# Altium PCB High-voltage.PcbDoc (part 2 of 2)
Units mil, origin at the board's own origin, x right, y up, seen from the top; angles counter-clockwise.
Board outline 11023.62 x 6692.91 mil, 2 copper layers (Top Layer, Bottom Layer); 241 components, 97 nets, 501 pads, 433 vias.
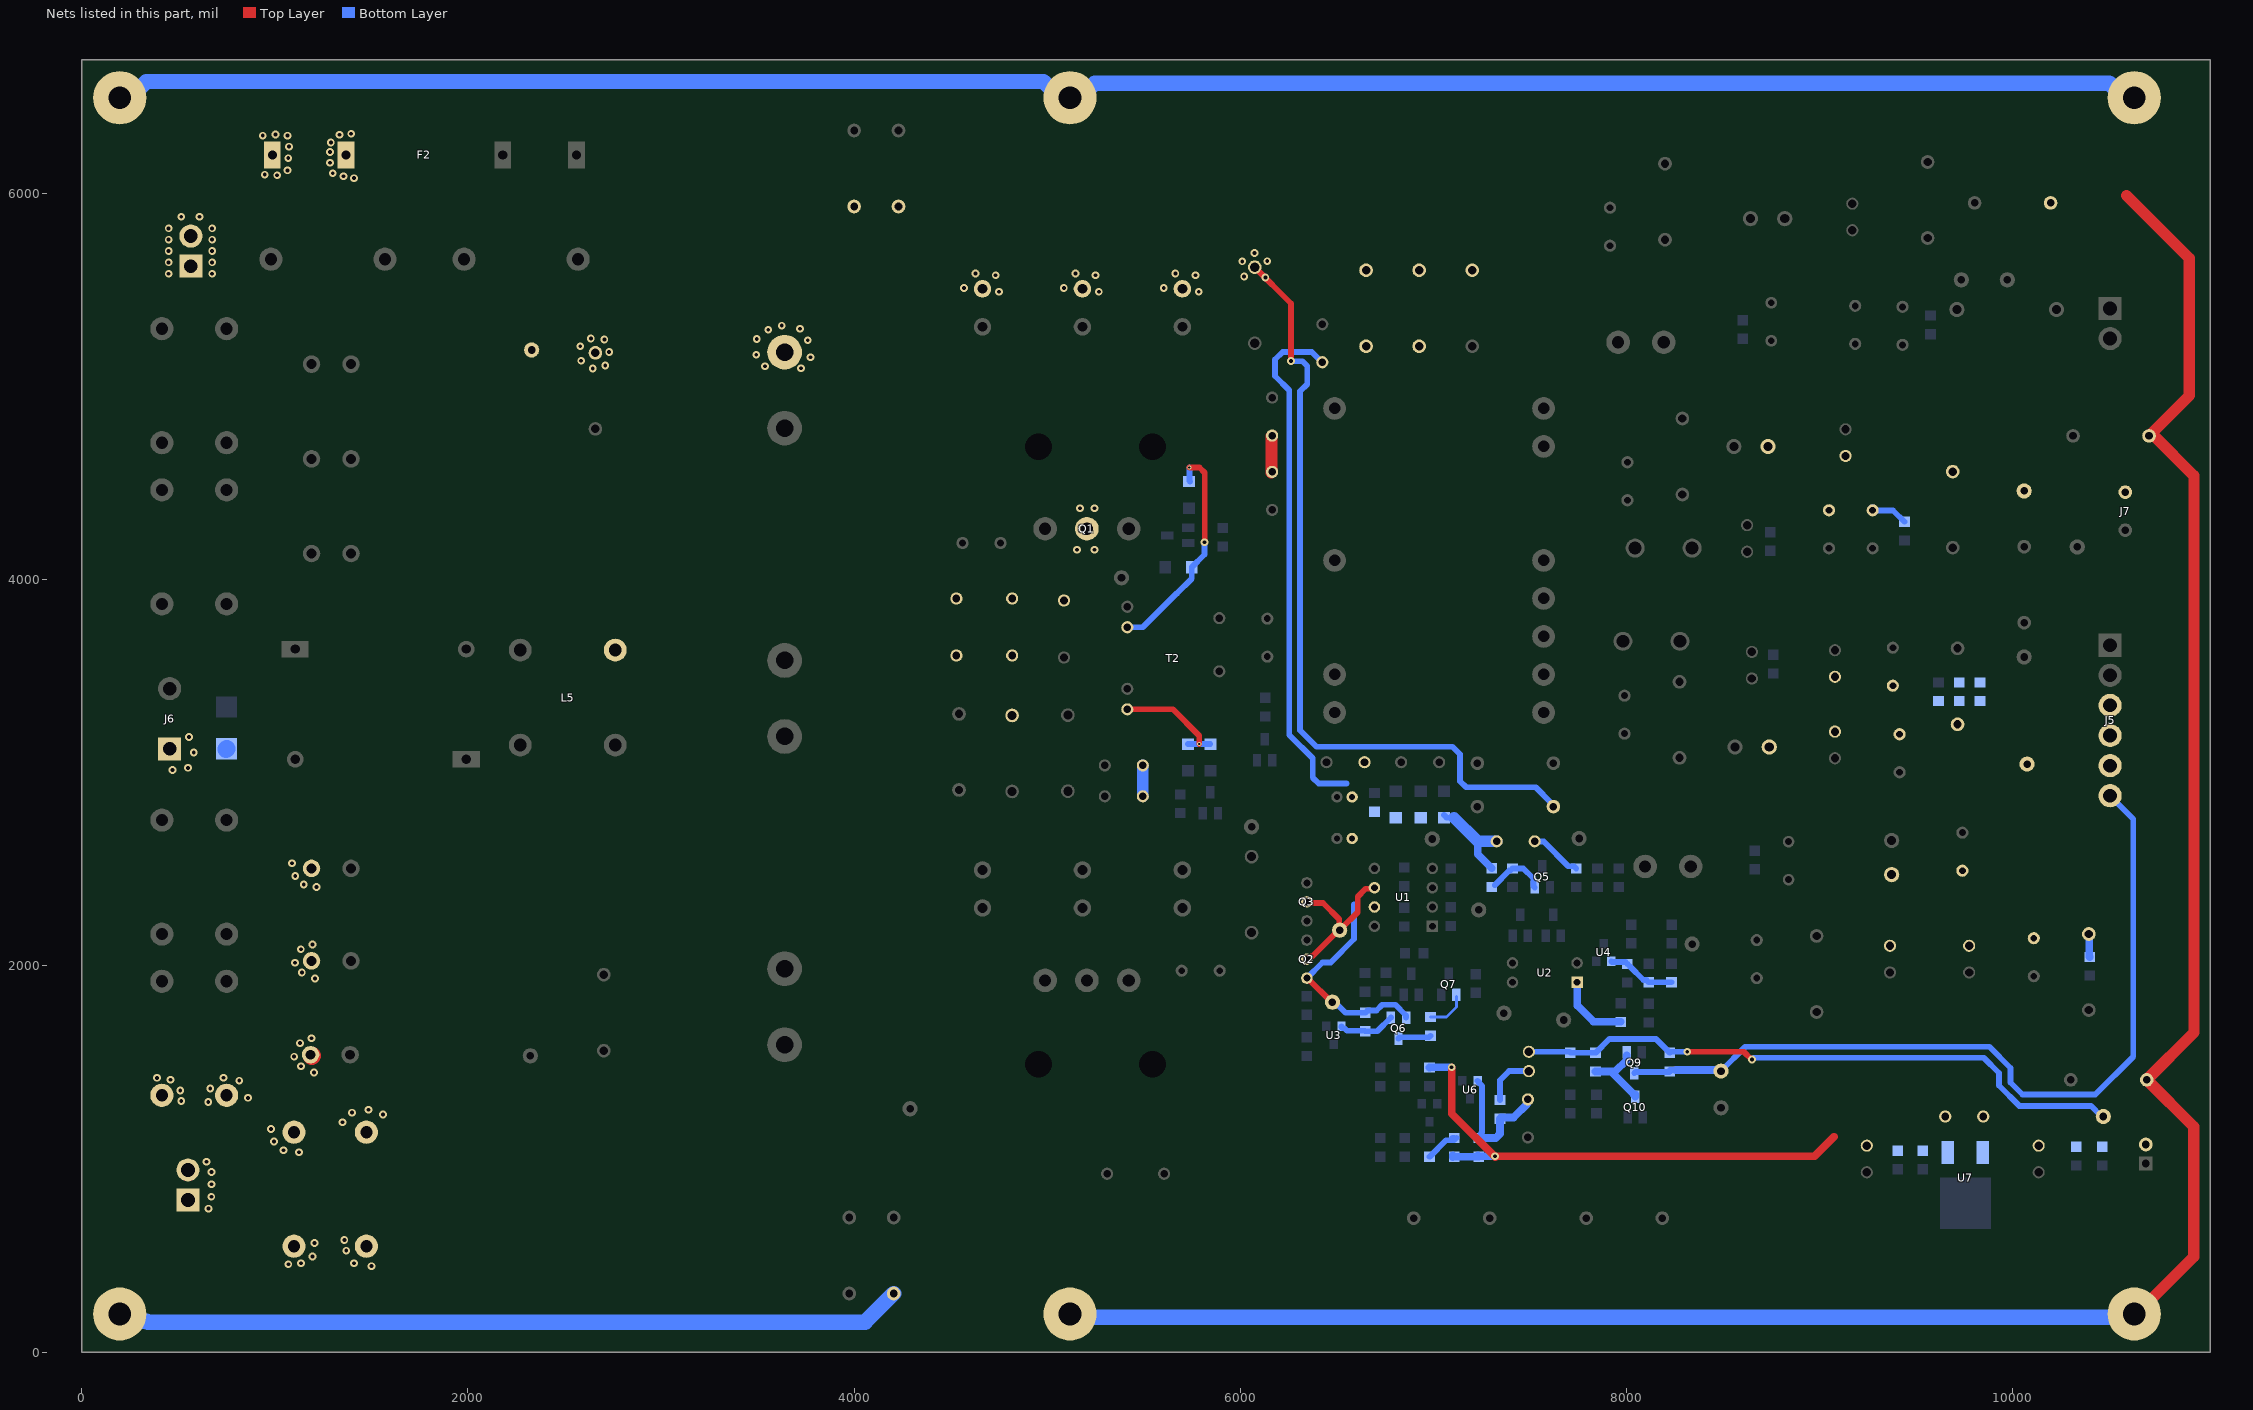
[diagram p2: the nets of this part, all layers, seen from the top]

## Via types
v1: diameter 40, hole 20, Top Layer to Bottom Layer, tented both sides, 426 vias
v2: diameter 40, hole 20, Top Layer to Bottom Layer, 3 vias
v3: diameter 22, hole 12, Top Layer to Bottom Layer, 2 vias
v4: diameter 22, hole 12, Top Layer to Bottom Layer, tented both sides, 1 vias
v5: diameter 40, hole 22, Top Layer to Bottom Layer, 1 vias

## Nets (pads, with @x,y where several pads share a name; then routed paths per layer and width w, separated by ;. In a path a pad name is that pad's centre, name@x,y a point inside that pad or via, vN(x,y) a via of type N, cw(c..) or ccw(c..) an arc to the next point about the centre after c; other vN are vias at no path point) (continued)
NetD25_1: D25.1 D26.1 D28.1 SR10.1 SR11.1 SR12.1 | length 17.4
  Top Layer w90: D26.1@415,1329.72 D26.1@419.72,1325 ; D25.1@750,1329.72 D25.1@754.72,1325 ; SR10.1@1190.28,1532.47 SR10.1@1193.15,1535.34
  other v1: 1350,1190 1560,1230 1400,1240 1485,1255 655,1295 515,1300 860.72,1316.66 510,1355 665,1365 815.34,1405.55 460,1410 390,1420 733.62,1421 1203.2,1448.26 1135,1480 1100,1530 1130,1600 1190,1625 1207.92,1934.53 1139.72,1966.27 1104.72,2016.27 1134.72,2086.27 1194.72,2111.27 1216.12,2408.28 1149.94,2421.97 1105.82,2465.33 1089.09,2531.51
NetD27_1: D27.1 D28.2 | length 11.7
  Top Layer w90: D28.2@1474.06,548.1 1483.1,548.1 D28.2@1485,550
  other v1: 1500,445 1070,455 1135,460 1410,460 1195,495 1370,525 1205,565 1360,580
NetD27_2: D27.2 J3.1 J3.2 | length 18.6
  Top Layer w90: J3.2@550,930 J3.2@555,935 ; D27.2@1099.06,1138.65 1108.65,1138.65 D27.2@1110,1140
  other v1: 656.43,742.53 671.03,804.3 671.94,869.03 671.59,932.88 646.32,985.67 1125,1035 1045,1045 995,1090 980,1155
NetF2_1: F2.1 F2.2 J1.1 J1.2
  other v1: 450,5585 675,5585 450,5643.75 675,5643.75 450,5702.5 675,5702.5 450,5761.25 675,5761.25 450,5820 675,5820 515,5880 610,5880 1410,6080 1355,6090 1011.77,6094.89 947.51,6098.12 1300,6105 1065.52,6120.35 1285,6160 1069.56,6183.39 1285,6215 1073.2,6243.21 1290,6265 937,6300.19 1065,6300 1003.69,6305.45 1335,6305 1395,6310
NetF3_1: F3.1 J6.1 | length 4
  Bottom Layer w90: F3.1@747.19,3121.29 F3.1@750,3124.09
  other v1: 470,3015 550.13,3025.8 580.1,3105.52 555.52,3185.25
NetJ5_6: J5.6 Q9.3 R38.2 TP17.1 | length 4271
  Bottom Layer w30: Q9.3@8040.84,1444.84 8046.58,1450.57 8222.03,1450.57 R38.2@8225,1453.54 ; R38.2@8225,1460.63 8255,1460.63 ; TP17.1@8490,1455 8615.71,1580.71 9879.87,1580.71 9989.87,1470.71 9989.87,1395.43 10051.65,1333.66 10428.66,1333.66 10625,1530 10625,2761.38 J5.6@10505,2881.38
  Bottom Layer w40: 8255,1460.63 8470,1460.63 8475.63,1455 TP17.1@8490,1455
NetLED1_1: LED1.1 R46.1 | length 276.3
  Bottom Layer w30: R46.1@7345,1305 7345,1407.43 7392.57,1455 7485,1455 LED1.1@7495,1465
NetQ2_2: Q2.2 Q3.2 TP7.1 U1.6 | length 812.7
  Top Layer w30: Q2.2@6345,2035 6353.12,2035 6368.12,2050 6373.89,2050 6508.89,2185 TP7.1@6515,2185 ; Q3.2@6345,2331.58 6350.74,2325.84 6428.51,2325.84 6512.51,2241.83 6512.51,2187.49 TP7.1@6515,2185 ; U1.6@6695,2405 6689.26,2399.26 6649.26,2399.26 6608.15,2358.15 6608.15,2278.15 6524.33,2194.33 TP7.1@6515,2185
NetQ5_2: Q5.2 R27.1 R33.1 | length 307.3
  Bottom Layer w30: R27.1@7317.79,2417.79 7393.43,2493.43 7398.43,2493.43 R33.1@7410,2505 7465.85,2505 7518.72,2452.13 7518.72,2413.19 Q5.2@7525.37,2406.54
NetQ6_1: Q6.1 R32.2 U3.2 | length 296.4
  Bottom Layer w30: U3.2@6524.37,1686.26 6524.37,1683.31 6531.02,1676.65 6540.38,1676.65 6553.32,1663.71 6644.89,1663.71 R32.2@6647.35,1661.26 ; R32.2@6648.33,1661.26 6648.52,1661.45 6709.59,1661.45 Q6.1@6780.33,1732.19
NetQ6_3: Q6.3 R37.1 | length 171.4
  Bottom Layer w30: Q6.3@6819.7,1623.92 6825.78,1630 6976.46,1630 R37.1@6985,1638.54
NetQ7_1: Q7.1 R37.2 | length 210.9
  Bottom Layer w15: R37.2@6985,1735 7067.89,1735 7119.37,1786.48 Q7.1@7119.37,1841.73
NetQ9_1: Q9.1 Q10.3 R39.2 | length 395.8
  Bottom Layer w40: R39.2@7840,1453.54 7919.25,1453.54 ; Q9.1@8001.52,1535.58 8001.47,1535.54 8001.47,1512.28 7942.74,1453.54 7919.25,1453.54 ; Q10.3@8045.63,1323.27 8045.63,1334.09 8043.98,1335.75 8037.05,1335.75 7919.25,1453.54
NetR1_2: R1.2 R2.2
NetR2_1: R2.1 R3.1
NetR5_1: R5.1 R7.1 T2.6 | length 1178.4
  Top Layer w30: v3(5736.6,4581.01) 5788.99,4581.01 5816.01,4553.99 5816.01,4195.43 v2(5815.03,4194.46)
  Bottom Layer w30: T2.6@5415,3753.9 5495,3753.9 5670.48,3929.38 5672.6,3929.38 5748.9,4005.67 R5.1@5748.9,4065 5815.03,4131.14 v2(5815.03,4194.46) ; v3(5736.6,4581.01) 5736.6,4512.3 R7.1@5740,4508.9
NetR13_1: R13.1 R16.1 T2.10 | length 587.5
  Top Layer w30: T2.10@5415,3328.7 5651.3,3328.7 5787.5,3192.5 v4(5787.5,3148.9)
  Bottom Layer w30: R16.1@5730,3148.9 v4(5787.5,3148.9) R13.1@5845,3148.9
NetR26_2: R26.2 U2.1 | length 380.4
  Bottom Layer w40: U2.1@7744.65,1915 7744.65,1795.35 7830,1710 R26.2@7970,1710
NetR28_2: R28.2 R30.2
NetR30_1: R30.1 R34.1
NetR31_2: R31.2 R36.1 R41.1 U4.1 | length 339.1
  Bottom Layer w30: U4.1@7921.61,2023.33 7925.55,2019.39 7995.61,2019.39 R41.1@8005,2010 ; R41.1@8017.56,1998.15 8089.13,1926.57 8103.43,1926.57 R36.1@8115,1915 R31.2@8233.33,1915
NetR35_1: R35.1 VD6.2 | length 273
  Bottom Layer w30: VD6.2@7525,2645 7526.36,2643.64 7571.82,2643.64 7698.88,2516.57 7728.43,2516.57 R35.1@7740,2505
NetR40_2: R40.2 R47.1 | length 187.3
  Bottom Layer w30: R47.1@6980,1011.77 6980.98,1011.77 7065.87,1096.65 7106.65,1096.65 R40.2@7120,1110 ; R40.2@7105,1110 7106.77,1108.23 R40.2@7107.5,1108.23
  Bottom Layer w40: R40.2@7099.94,1101.65 7100,1101.71 R40.2@7100,1105
NetR45_2: R45.2 R46.2 U6.2 VD7.1 | length 701.8
  Bottom Layer w30: U6.2@7229.37,1404.7 7236.02,1398.05 7236.02,1395.1 7252.72,1378.41 7252.72,1137.38 7247.56,1132.22 7247.56,1119.8 7235.98,1108.23 R45.2@7235,1108.23
  Bottom Layer w40: R45.2@7235,1108.23 7323.23,1108.23 7345,1130 R46.2@7345,1208.54 ; R46.2@7350.12,1215.12 7416.29,1215.12 7485.6,1284.43 7485.6,1304.18 VD7.1@7490,1308.58
NetVD2_1: VD2.1 VD3.1 | length 197.6
  Top Layer w60: VD2.1@6160,4555 VD2.1@6165,4560 ; VD2.1@6165,4558.58 6165,4559.39 6161.72,4562.67 6161.72,4742.33 6165,4745.61 VD3.1@6165,4746.42
NetVD4_1: VD4.1 VD5.1 | length 160
  Bottom Layer w60: VD4.1@5495.57,2878.35 VD5.1@5495.57,3038.35
PE: C5.2 C14.2 C43.1 C61.2 C65.1 SC1.1 SC2.1 SC3.1 SC4.1 SC5.1 SC6.1 | length 26516.8
  Top Layer w59.06: 10590,5990 10916.01,5663.99 10916.01,4954.16 C14.2@10706.85,4745 10709.11,4742.74 10734.71,4742.74 10939.84,4537.62 10939.84,1654.84 C43.1@10695,1410 10938.96,1166.04 10938.96,494.12 SC5.1@10625.92,181.08
  Bottom Layer w80: SC2.1@196.85,196.85 234.28,159.43 337.08,159.43 341.51,155 618.31,155 4056.85,155 C65.1@4205,303.15 ; SC3.1@196.85,6496.06 249.78,6496.06 334.16,6580.44 4980.8,6580.44 5065.18,6496.06 5171.04,6496.06 5247.16,6572.19 10500.87,6572.19 10576.99,6496.06 SC1.1@10629.92,6496.06 ; SC4.1@5171.56,181.06 SC5.1@10561.21,181.06
VCC+5V: C52.1 C66.1 C67.2 D22.2 J2.2 LED1.2 R38.1 R39.1 R53.1 TP21.1 U7.3 | length 3224.1
  Top Layer w30: v1(8315,1555) 8607.29,1555 8647.29,1515 v1(8650,1515)
  Bottom Layer w30: LED1.2@7495,1555 7705,1555 C52.1@7710,1550 7710.17,1550.17 7839.83,1550.17 R39.1@7840,1550 7840.98,1550 7913,1622.02 8152,1622.02 8224.02,1550 R38.1@8225,1550 8230,1555 v1(8315,1555) ; v1(8650,1515) 8652.71,1515 8662.18,1524.48 9851.34,1524.48 9930,1445.82 9930,1380 10035,1275 10405.68,1275 10460.68,1220 TP21.1@10470,1220
VCC+12V: C16.2 C17.1 C19.1 C20.1 J7.3 L2.2 R12.2 TP5.1 | length 189.4
  Bottom Layer w30: C17.1@9275.86,4359.07 9380.93,4359.07 C16.2@9440,4300
  Bottom Layer w60: C17.1@9275.29,4359.65 C17.1@9275.86,4359.07
VCC+15V: C36.1 C37.1 C39.1 C40.1 C41.1 C45.2 C46.2 C68.1 C70.2 D22.1 J5.4 J5.5 L4.2 R24.1 R40.1 R43.1 R45.1 R54.1 TP15.1 U7.1 | length 2824.8
  Top Layer w40: v1(7095,1475) 7095,1235 v1@7320,1010 ; v1(7319.74,1014.38) 8974.38,1014.38 9075,1115
  Bottom Layer w40: R43.1@6980,1473.23 6981.77,1475 v1@7090,1475 ; R40.1@7099.94,1019.85 7099.94,1018.35 7106.51,1011.77 R40.1@7107.5,1011.77 ; R40.1@7100,1010 7101.77,1011.77 R45.1@7235,1011.77 7237.84,1014.62 7319.51,1014.62 v1(7319.74,1014.38) ; R45.1@7231.65,1018.35 R45.1@7235,1015 ; R24.1@10395,2165 10397.5,2162.5 10397.5,2048.96 C39.1@10400,2046.46
VCC+18V: C2.1 C4.2 C44.1 D1.1 Q2.1 Q6.2 R18.1 R21.1 R23.1 R27.2 R32.1 TP1.1 U1.7 VD1.1 VD6.1 | length 4364.6
  Top Layer w30: Q2.1@6345,1936.58 6348.87,1936.58 6473.37,1812.08 TP1.1@6477.24,1812.08
  Bottom Layer w30: Q2.1@6345,1936.58 6426.31,2017.89 6468.24,2017.89 6589.65,2139.3 6589.65,2318.46 ; D1.1@6425,5126.42 6423.98,5126.42 6370.4,5180 6220,5180 6180,5140 6180,5055 6253.81,4981.19 6253.81,3196.43 6375,3075.24 6375,2975 6406,2944 6550,2944 ; TP1.1@6477.24,1812.08 6490.43,1812.08 6545.45,1757.05 6634.79,1757.05 6635.45,1757.71 R32.1@6647.35,1757.71 6658.92,1769.29 6706.05,1769.29 6735,1798.24 6803.85,1798.24 6859.07,1743.01 Q6.2@6859.07,1732.19 ; R23.1@7055,2782.2 7069.53,2767.68 7107.03,2767.68 ; R27.2@7302,2505.65 R27.2@7302.98,2505.65
  Bottom Layer w40: 7229.71,2645 7229.71,2577.94 R27.2@7302,2505.65
  Bottom Layer w60: 7107.03,2767.68 7229.71,2645 VD6.1@7328.15,2645
VCC-15V: C30.2 C32.2 C33.2 C34.1 C35.1 C36.2 C37.2 J5.3 L3.2 R19.2
VDC: C48.1 C58.1 C59.1 D3.1 D4.2 L5.3 Q1.2 R1.1 R28.1 R51.2 SR1.2 SR2.2 SR3.2 TP19.1 | length 4096.4
  Top Layer w30: D4.2@6075,5618.7 6262.96,5430.74 v1(6262.96,5133.22)
  Bottom Layer w30: v1(6262.96,5133.22) 6264.87,5131.31 6321.8,5131.31 6346.55,5106.55 6346.55,5012.52 6310,4975.96 6310,3220.16 6395.2,3134.96 7099.08,3134.96 7138.3,3095.74 7138.3,2956.7 7170,2925 7530,2925 C48.1@7610,2845
  other v1: 5155,4155 5245,4155 5170,4370 5245,4370 2646.46,5094.11 3725,5095 3538.35,5105.56 2711.46,5109.11 2586.46,5134.11 3774.66,5151.99 3492.91,5165.31 2731.46,5179.11 2581.46,5209.11 3760,5240 2706.46,5244.11 3495.43,5246.93 2636.46,5249.11 3555,5295 3720,5300 3625.25,5315.86 4750,5491.85 5267.5,5491.85 5785,5491.85 4568.95,5511.41 5086.45,5511.41 5603.95,5511.41 6130.1,5565.09 6020,5570 4732.95,5577.12 5250.45,5577.12 5767.95,5577.12 4628.95,5586.27 5146.45,5586.27 5663.95,5586.27 6010.16,5649.04 6140,5650 6074.13,5691.82
pads on no net: Designator11.1 Designator11.2 Designator12.1 Designator12.2 J6.2 J7.2

## Polygon pours and split planes (outlines as drawn)
NetC21_2 on Top Layer "NONET_L01_P-001" (hatched Horizontal grid 4 track 5, remove dead copper, pour order 198): 8090,3335 8115,3310 8115,3200 8180,3135 8320,3135 8345,3110 8345,3025 8315,2995 8120,2995 7885,3230 7885,3315 7905,3335
GND on Top Layer "NONET_L01_P-001" (hatched Horizontal grid 4 track 5, remove dead copper, pour order 197): 6515,3010 6535,2990 6700,2990 6715,2975 6715,2935 6705,2925 6550,2925 6510,2900
NetD13_2 on Top Layer "NONET_L01_P-001" (hatched Horizontal grid 4 track 5, remove dead copper, pour order 196): 6465,3575 6465,3570 6430,3535 6430,3485 6460,3455 6525,3455 6580,3400 6580,3155 6625,3110 6730,3110 6815,3025 6860,3025 6885,3050 6885,3110 6725,3255 6725,3375 6725,3495 6645,3575
GND on Top Layer "NONET_L01_P-001" (hatched Horizontal grid 4 track 5, remove dead copper, pour order 194): 6440,3375 6525,3375 6550,3350 6550,3250 6550,2575 6590,2535 6720,2535 6730,2525 6730,2480 6720,2470 6505,2470 6440,2535 6440,2890 6415,2915 6415,3350
NetC12_1 on Top Layer "NONET_L01_P-001" (hatched Horizontal grid 4 track 5, remove dead copper, pour order 193): 4807.65,4352 4800.65,4345 4735,4345 4715,4325 4715,4175 4740,4150 4835,4150 4945,4040 4981,4004 5174,4004 5230,4060 5230,4105 5215,4120 5080,4120 5043.68,4156.32 5043.68,4344 4886,4344 4885,4345
NetC12_1 on Top Layer "NONET_L01_P-001" (hatched Horizontal grid 4 track 5, remove dead copper, pour order 191): 5227.37,3937.63 5142.38,4022.63 5227.37,4107.63 5280,4055 5415,4055 5445,4025 5445,3845 5420,3820 5345,3820 5305,3780 5305,3445 5120,3260 5085,3260 5055,3290 5055,3340 5227.37,3512.37
no net on Top Layer "NONET_L01_P-001" (hatched Horizontal grid 4 track 5, remove dead copper, pour order 190): 4985,4245
NetC12_1 on Top Layer "NONET_L01_P-001" (hatched Horizontal grid 4 track 5, remove dead copper, pour order 189): 4805,4350 5170,4625 5170,4905 5280,5015 6315,5015 6375,4955 6525,4955 6560,4920 6560,4805 6545,4790 6345,4790 6270,4865 5395,4865 5340,4810 5340,4545 4982.5,4302.5 4970,4315
NetD3_2 on Top Layer "NONET_L01_P-001" (hatched Horizontal grid 4 track 5, remove dead copper, pour order 183): 5976.08,2920 5999.59,2992.5 6005,3325 6125,3445 6235,3555 6235,4075 6335,4175 6570,4175 6590,4155 6590,4035 6550,3995 6370,3995 6355,3980 6355,3480 6170,3295 6170,2971.43
no net on Top Layer "NONET_L01_P-001" (hatched Horizontal grid 4 track 5, remove dead copper, pour order 181): 6060,3170
NetD3_2 on Top Layer "NONET_L01_P-001" (hatched Horizontal grid 4 track 5, remove dead copper, pour order 180): 5909.5,2714.72 5999.59,2992.5 6170,2992.5 6170,2522.03 6096.76,2455 5155,2455 5140,2470 5140,2665 5200,2725
NetC28_1 on Top Layer "NONET_L01_P-001" (hatched Horizontal grid 4 track 5, remove dead copper, pour order 178): 5405,2005 5370,1970 5365,1965 5365,1890 5395,1860 5470,1860 5720,1610 5720,1070 5650,1000 5590,1000 5570,980 5570,905 5595,880 5830,880 5885,935 5885,1685 5735,1835 5735,1980 5710,2005 5660,2005
NetC28_2 on Top Layer "NONET_L01_P-001" (hatched Horizontal grid 4 track 5, remove dead copper, pour order 175): 4640,2345 4615,2315 4615,2205 4665,2155 5825,2155 5860,2120 5860,1945 5875,1930 5915,1930 6105,2120 6105,2330 6090,2345 4670,2345
NetR28_2 on Top Layer "NONET_L01_P-001" (hatched Horizontal grid 4 track 5, remove dead copper, pour order 172): 4505,3565 4495,3575 4495,3710 4511.67,3735 4835,3735 4855,3715 4855,3580 4845,3570 4785,3570 4775,3580 4775,3660 4750,3685 4582.35,3685 4560,3666.9 4560,3575 4550,3565
no net on Top Layer "NONET_L01_P-001" (hatched Horizontal grid 4 track 5, remove dead copper, pour order 170): 4290,910
GND on Top Layer "NONET_L01_P-001" (hatched Horizontal grid 4 track 5, remove dead copper, pour order 169): 3895,1325 3915,1345 4315,1345 4390,1270 4640,1020 3950,1020 3935,1035
PE on Top Layer "NONET_L01_P-001" (hatched Horizontal grid 4 track 5, remove dead copper, pour order 168): 4165,485 4165,180 4195,150 4905,150 5000,55 5270,55 5365,150 5365,485 5340,510 4190,510
NetC64_2 on Top Layer "NONET_L01_P-001" (hatched Horizontal grid 4 track 5, remove dead copper, pour order 167): 3723.53,3018.47 3787,2955 4555,2955 4580,2930 4580,2685 4440,2545 3850,2545 3730,2425 3685,2470 3685,2935
NetC64_2 on Top Layer "NONET_L01_P-001" (hatched Horizontal grid 4 track 5, remove dead copper, pour order 164): 3680,3280 3750,3205 3750,3200 3750,1925 3715,1890 3470,1890 3230,2130 3230,3205 3305,3280
NetC59_2 on Top Layer "NONET_L01_P-001" (hatched Horizontal grid 4 track 5, remove dead copper, pour order 163): 3661.93,4230 4580,3311.93 4580,3180 4570,3170 4080,3170 3760,3490 3610,3490
no net on Top Layer "NONET_L01_P-001" (hatched Horizontal grid 4 track 5, remove dead copper, pour order 162): 3675,3975
NetC59_2 on Top Layer "NONET_L01_P-001" (hatched Horizontal grid 4 track 5, remove dead copper, pour order 161): 3680,4875 3735,4820 3735,3545 3680,3490 3360,3490 3205,3645 3205,4875
NetD24_1 on Top Layer "NONET_L01_P-001" (hatched Horizontal grid 4 track 5, remove dead copper, pour order 157): 316.67,2225 505,2225 520,2210 520,1880 500,1860 320,1860 300,1880 300,2212.5
NetD23_1 on Top Layer "NONET_L01_P-001" (hatched Horizontal grid 4 track 5, remove dead copper, pour order 156): 656.67,2225 845,2225 860,2210 860,1880 840,1860 660,1860 640,1880 640,2212.5
NetD21_1 on Top Layer "NONET_L01_P-001" (hatched Horizontal grid 4 track 5, remove dead copper, pour order 152): 460,3535 495,3500 510,3485 510,3410 475,3375 345,3375 265,3320 265,3385 265,3455 345,3535
NetD19_1 on Top Layer "NONET_L01_P-001" (hatched Horizontal grid 4 track 5, remove dead copper, pour order 151): 316.67,4770 505,4770 520,4755 520,4425 500,4405 320,4405 300,4425 300,4757.5
VCC+12V on Top Layer "NONET_L01_P-001" (hatched Horizontal grid 4 track 5, remove dead copper, pour order 147): 8725,4735 8695,4705 8695,4300 8745,4250 10265,4250 10355,4340 10585,4340 10620,4375 10620,4560 10555,4625 9900,4625 9790,4735
no net on Top Layer "NONET_L01_P-001" (hatched Horizontal grid 4 track 5, remove dead copper, pour order 145): 5140,880
NetC60_2 on Top Layer "NONET_L01_P-001" (hatched Horizontal grid 4 track 5, remove dead copper, pour order 143): 1085,3675 1060,3650 1060,3052 1087,3025 1312,3025 1360,3073 1365,3073 1365,3650 1340,3675
NetC60_1 on Top Layer "NONET_L01_P-001" (hatched Horizontal grid 4 track 5, remove dead copper, pour order 142): 1375,5160 1350,5135 1350,4115 1370,4095 1505,4095 1855,3745 1855,3610 1890,3575 2295,3575 2335,3615 2335,4065 1890,4510 1890,5120 1850,5160
NetD17_2 on Top Layer "NONET_L01_P-001" (hatched Horizontal grid 4 track 5, remove dead copper, pour order 141): 810,5365 840,5365 920,5445 920,5675 960,5715 1195,5715 1240,5670 1240,5312.44
no net on Top Layer "NONET_L01_P-001" (hatched Horizontal grid 4 track 5, remove dead copper, pour order 140): 795,5395
NetD17_2 on Top Layer "NONET_L01_P-001" (hatched Horizontal grid 4 track 5, remove dead copper, pour order 139): 315,5390 280,5355 280,5060 305,5035 905,5035 985,4955 985,4120 1015,4090 1210,4090 1240,4120 1240,5325 1155,5410 1135,5390
NetF2_1 on Top Layer "NONET_L01_P-001" (hatched Horizontal grid 4 track 5, remove dead copper, pour order 138): 385,6000 385,5585 415,5555 680,5555 730,5605 730,5870 890,6030 1500,6030 1520,6050 1520,6310 1465,6355 740,6355
NetD16_1 on Top Layer "NONET_L01_P-001" (hatched Horizontal grid 4 track 5, remove dead copper, pour order 137): 2130,6365 2125,6360 2080,6315 2080,6005 2125,5960 2440,5960 2505,5895 2505,5630 2535,5600 2945,5600 2970,5625 2970,6325 2925,6370 2135,6370
NetD16_2 on Top Layer "NONET_L01_P-001" (hatched Horizontal grid 4 track 5, remove dead copper, pour order 135): 1545,5720 2005,5720 2040,5685 2040,5435 2015,5410 1520,5410 1490,5440 1490,5665
NetC69_2 on Top Layer "NONET_L01_P-001" (hatched Horizontal grid 4 track 5, remove dead copper, pour order 134): 1350,1536 1380,1506 1580,1506 1660,1550.44 1660,2561 2009,2910 2265,2910 2325,2970 2325,3240 2299,3266 1781,3266 1350,2835
no net on Top Layer "NONET_L01_P-001" (hatched Horizontal grid 4 track 5, remove dead copper, pour order 133): 1335,1580
NetD18_1 on Top Layer "NONET_L01_P-001" (hatched Horizontal grid 4 track 5, remove dead copper, pour order 132): 656.67,4770 845,4770 860,4755 860,4425 840,4405 660,4405 640,4425 640,4757.5
NetD21_1 on Top Layer "NONET_L01_P-001" (hatched Horizontal grid 4 track 5, remove dead copper, pour order 127): 265,2665 410,2665 480,2735 480,2885 425,2940 330,2940 285,2985 285,3375 470,3375 470,3905 440,3935 140,3935 95,3890 95,2725 155,2665 320,2665
NetD25_1 on Top Layer "NONET_L01_P-001" (hatched Horizontal grid 4 track 5, remove dead copper, pour order 124): 360,1617.5 360,1295 380,1275 1180,1275 1375,1080 1590,1080 1610,1100 1610,1335 1590,1355 1345,1355 1240,1460 1240,2515 1200,2555 1020,2555 985,2520 985,1715 920,1650 403.33,1650
NetD27_1 on Top Layer "NONET_L01_P-001" (hatched Horizontal grid 4 track 5, remove dead copper, pour order 121): 1065,605 1040,580 1040,365 1055,350 1505,350 1535,380 1535,580 1510,605
VCC+15V on Top Layer "NONET_L01_P-001" (hatched Horizontal grid 4 track 5, remove dead copper, pour order 118): 10560.86,2254.14 10740,2075 10755,2060 10755,1710 10565,1520 9445,1520 9275,1350 9275,1050 9260,1035 9080,1035 9050,1065 9050,1495 9220,1665 10500,1665 10520,1685 10520,2020 10427.29,2112.71
no net on Top Layer "NONET_L01_P-001" (hatched Horizontal grid 4 track 5, remove dead copper, pour order 117): 10540,2245
GND+15V on Top Layer "NONET_L01_P-001" (hatched Horizontal grid 4 track 5, remove dead copper, pour order 116): 10050,1440 10430,1440 10735,1135 10735,930 10675,870 10020,870 9970,915.24 9970,1376
PE on Top Layer "NONET_L01_P-001" (hatched Horizontal grid 4 track 5, remove dead copper, pour order 108): 10075,6490 10560,6490 10635,6415 10635,5970 10555,5890 10085,5890 10025,5950 10025,6450 10035,6450
no net on Top Layer "NONET_L01_P-001" (hatched Horizontal grid 4 track 5, remove dead copper, pour order 107): 10040,6560
GND+15V on Top Layer "NONET_L01_P-001" (hatched Horizontal grid 4 track 5, remove dead copper, pour order 103): 9140,1995 9140,1765 9175,1730 10415,1730 10445,1760 10445,2015 10425,2035 9180,2035
VCC+15V on Top Layer "NONET_L01_P-001" (hatched Horizontal grid 4 track 5, remove dead copper, pour order 102): 10315,3230 10285,3230 10570,3230 10585,3215 10585,2980 10555,2950 10325,2950 10315,2940 10315,2710 10365,2660 10385,2660 10505,2660 10570,2595 10575,2595 10575,2160 10480,2065 9220,2065 9200,2085 9200,2535 9235,2570 9540,2570 9595,2575 9920,2575 9965,2620 9965,3095 10100,3230 10375,3230
NetC47_2 on Top Layer "NONET_L01_P-001" (hatched Horizontal grid 4 track 5, remove dead copper, pour order 100): 8770,2000 8820,1950 8820,1855 8845,1830 9005,1830 9025,1810 9025,1705 9005,1685 8620,1685 8585,1720 8585,1995 8590,2000
NetC38_1 on Top Layer "NONET_L01_P-001" (hatched Horizontal grid 4 track 5, remove dead copper, pour order 99): 8250,2755 8250,2455 8275,2430 8630,2430 8775,2285 8830,2230 8830,2155 8865,2120 9145,2120 9170,2145 9170,2555 9205,2590 9389.99,2590 9415,2615.01 9415,2770 9400,2785 8280,2785
NetC47_1 on Top Layer "NONET_L01_P-001" (hatched Horizontal grid 4 track 5, remove dead copper, pour order 98): 8160,2468 8185,2408.56 8591.44,2408.56 8710,2290 8710,2115 8695,2100 8615,2100 8580,2135 8580,2245 8500,2325 8153.85,2325
NetC47_1 on Top Layer "NONET_L01_P-001" (hatched Horizontal grid 4 track 5, remove dead copper, pour order 97): 7565,3205 7648.27,3240.55 7759.41,3129.41 8160,2795 8160,2325 7940,2325 7880,2385 7880,2700 7650,2930 7520,2930 7475,2975 7475,3175 7505,3205
GND+15V on Top Layer "NONET_L01_P-001" (hatched Horizontal grid 4 track 5, remove dead copper, pour order 94): 9005,3151.2 9423.8,3151.2 9450,3125 9450,2970 9426.2,2946.2 9015,2946.2 8990,2971.2 8990,3136.2
GND+15V on Top Layer "NONET_L01_P-001" (hatched Horizontal grid 4 track 5, remove dead copper, pour order 92): 8631.2,3801.2 8615,3785 8615,3605 8638.8,3581.2 9941.2,3581.2 9955,3595 9955,3790 9943.8,3801.2
NetC21_1 on Top Layer "NONET_L01_P-001" (hatched Horizontal grid 4 track 5, remove dead copper, pour order 91): 7485,3751.2 7525,3791.2 8110,3791.2 8130,3771.2 8130,3391.2 8098.8,3360 7876.2,3360 7800,3436.2 7800,3626.2 7513.8,3626.2 7485,3655
no net on Top Layer "NONET_L01_P-001" (hatched Horizontal grid 4 track 5, remove dead copper, pour order 90): 7470,3750
NetC15_2 on Top Layer "NONET_L01_P-001" (hatched Horizontal grid 4 track 5, remove dead copper, pour order 89): 8170,4485 8365,4485 8435,4555 8435,4685 8485,4735 8615,4735 8660,4690 8660,4260 8650,4250 8405,4250 8395,4240 8395,4145 8370,4120 8190,4120 8150,4160 8150,4465
GND+12V on Top Layer "NONET_L01_P-001" (hatched Horizontal grid 4 track 5, remove dead copper, pour order 88): 7505,4005 7480,3980 7480,3890 7510,3860 7670,3860 7800,3990 10610,3990 10625,4005 10625,4280 10605,4300 10380,4300 10310,4230 8424.91,4235.09 8414.09,4215 8414.09,4127.05 8373.52,4086.48 7691.89,4098.96 7618.24,4005
NetC13_1 on Top Layer "NONET_L01_P-001" (hatched Horizontal grid 4 track 5, remove dead copper, pour order 85): 7650,4080.56 7612.73,4035 7505,4035 7485,4055 7485,4405 7535,4455 8080,4455 8125,4410 8125,4175 8095.17,4125.82 7681.36,4118.89
"MON GND" on Top Layer "NONET_L01_P-001" (hatched Horizontal grid 4 track 5, remove dead copper, pour order 84): 7475,4780 7475,4645 7485,4635 7695,4635 8060,5000 8480,5000 8585,5105 9435.72,5105 9470,5139.28 9470,5305 9445,5330 8525,5330 8330,5135 7945,5135 7625,4815 7510,4815
NetC1_1 on Top Layer "NONET_L01_P-001" (hatched Horizontal grid 4 track 5, remove dead copper, pour order 80): 7615,4830 7555,4830 7510,4875 7510,5710 7590,5790 7995,5790 8045,5740 8045,5225 7985,5165 7950,5165
no net on Top Layer "NONET_L01_P-001" (hatched Horizontal grid 4 track 5, remove dead copper, pour order 79): 7475,4800
VCC-15V on Top Layer "VCC-15V_L01_P074" (solid, pour order 74): 8775,3571.2 8730,3571.2 8725,3566.2 8725,3406.2 8720,3401.2 8655,3401.2 8645,3391.2 8645,2996.2 8672.64,2968.56 8947.71,2973.66 8976.08,2996.2 8980.3,3140.9 9010,3166.2 9716.2,3166.2 9796.2,3246.2 10546.2,3246.2 10580,3280 10580,3465 10550,3495 9896.2,3495 9825,3566.2 8730,3566.2
NetC29_2 on Top Layer "NETC29_2_L01_P073" (solid, pour order 73): 8165,3796.2 8145,3776.2 8145,3326.2 8145,3216.2 8195,3166.2 8380,3166.2 8385,3161.2 8385,3001.2 8410,2976.2 8620,2976.2 8635,2991.2 8635,3396.2 8645,3406.2 8690,3406.2 8710,3426.2 8710,3541.2 8685,3566.2 8618.8,3566.2 8575,3610 8575,3785 8563.8,3796.2
NetC13_2 on Top Layer "NETC13_2_L01_P064" (solid, pour order 64): 7970,4537.78 8010,4505 8345,4505 8385,4540 8385,4845 8360,4870 8200,4870 8180,4850 8180,4690 7990,4690 7970,4670
no net on Top Layer "NONET_L01_P056" (solid, pour order 56): 8325,4600
MON+15V on Top Layer "MON+15V_L01_P052" (solid, pour order 52): 10170,5480 10130,5440 10130,5170 10175,5125 10645,5125 10645,5440 10605,5480 10350,5480
NetC7_2 on Top Layer "NETC7_2_L01_P051" (solid, pour order 51): 8805,5920 8780,5895 8780,5705 8820,5665 8820,5445 8900,5365 9771.93,5364.61 9800,5400 9800,5810 9765,5850 9410,5855 9420,5850 9415,5855 9065,5855 9055,5865 9055,5895 9030,5920
no net on Top Layer "NONET_L01_P050" (solid, pour order 50): 8825,5940
NetC1_2 on Top Layer "NETC1_2_L01_P049" (solid, pour order 49): 7730,6210 7700,6180 7700,5865 7725,5840 8115,5840 8235,5960 8235,6190 8215,6210
NetC3_1 on Top Layer "NETC3_1_L01_P048" (solid, pour order 48): 8095,5190 8120,5165 8325,5165 8365,5205 8510,5350 8740,5350 8780,5390 8780,5655 8760,5675 8760,5815 8656.01,5918.99 8130.91,5920.91 8095,5885
NetC47_1 on Top Layer "NETC47_1_L01_P044" (solid, pour order 44): 7500,3365 7660,3365 7685,3340 7685,2990 7660,2965 7485,2965 7465,2985 7465,3330
no net on Top Layer "NONET_L01_P039" (solid, pour order 39): 5110,1650
NetC59_2 on Top Layer "NETC59_2_L01_P035" (solid, pour order 35): 3472.5,4875 3447.5,4875 2647.5,4875 2612.5,4840 2612.5,4490 2652.5,4450 3322.5,4450 3432.5,4560 3432.5,4820 3472.5,4860
NetC64_2 on Top Layer "NETC64_2_L01_P034" (solid, pour order 34): 2647.5,2177.5 2647.5,1912.5 2675,1885 3532.5,1885 3532.5,2200 3313.31,2316.01 3093.58,2197.91 2665.88,2195.88
GND on Top Layer "GND_L01_P033" (solid, pour order 33): 3980,475 4010,445 4010,255 3975,220 3450,220 3395,275 3395,1655 3430,1690 3800,1690 3850,1640 3850,1455 4200,1105 5315,1105 5360,1060 5360,895 5341.2,880.56 3696.91,871.91 3665,840 3665,520 3710,475
NetC65_2 on Top Layer "NETC65_2_L01_P031" (solid, pour order 31): 3950,795 3935,780 3935,680 3950,665 4230,665 4240,675 4240,780 4225,795
PE on Top Layer "PE_L01_P030" (solid, pour order 30): 4197.5,6125 4167.5,6095 4167.5,5940 4212.5,5895 5307.5,5895 5307.5,6535 5242.5,6600 4997.5,6600 4882.5,6485 4882.5,6220 4787.5,6125
NetC58_2 on Top Layer "NETC58_2_L01_P029" (solid, pour order 29): 3977.5,6457.5 3962.5,6442.5 3962.5,6307.5 3977.5,6292.5 4272.5,6292.5 4285,6305 4285,6440 4267.5,6457.5
NetC48_2 on Top Layer "NETC48_2_L01_P028" (solid, pour order 28): 7175,3085 7195,3105 7260,3105 7280,3085 7280,2765 7275,2760 7195,2760 7170,2785 7170,3085 7190,3105
no net on Top Layer "NONET_L01_P027" (solid, pour order 27): -85668.84,3115
no net on Top Layer "NONET_L01_P024" (solid, pour order 24): 6575,3140
NetD1_2 on Top Layer "NETD1_2_L01_P022" (solid, pour order 22): 6415,5385 6390,5360 6390,5295 6400,5285 7070,5285 7125,5230 7125,5190 7145,5170 7225,5170 7249.02,5194.02 7249.02,5370.39 7234.42,5385
NetR30_1 on Top Layer "NETR30_1_L01_P016" (solid, pour order 16): 4800,3925 4782.5,3907.5 4782.5,3877.5 4800,3860 5110,3860 5120,3870 5120,3915 5110,3925
NetC12_2 on Top Layer "NETC12_2_L01_P007" (solid, pour order 7): 6085,5155 6120,5180 6117.66,5332.34 6095,5355 4435,5355 4330,5250 4330,4215 4385,4160 4585,4160 4595,4170 4595,5035 4715,5155 5925,5155
GND on Bottom Layer "NONET_L01_P-001" (hatched Horizontal grid 4 track 5, remove dead copper, pour order 206): 6080,1422 6060,1402 6060,1217 6070,1207 6175,1207 6190,1222 6190,1417 6185,1422
NetC62_2 on Bottom Layer "NONET_L01_P-001" (hatched Horizontal grid 4 track 5, remove dead copper, pour order 204): 7270,740 7275,740 7805,740 7840,705 7840,585 7820,565 7275,565 7255,585 7255,730
GND+15V on Bottom Layer "NONET_L01_P-001" (hatched Horizontal grid 4 track 5, remove dead copper, pour order 203): 9094.3,864.3 9035,805 8155,805 8100,750 8100,595 8135,560 9235,560 9345,670
GND+12V on Bottom Layer "NONET_L01_P-001" (hatched Horizontal grid 4 track 5, remove dead copper, pour order 202): 10139.06,4835 10370,4835 10400,4805 10400,4660 10375,4635 10225,4635 10225,4630 10185,4590
no net on Bottom Layer "NONET_L01_P-001" (hatched Horizontal grid 4 track 5, remove dead copper, pour order 201): 10150,4840
no net on Bottom Layer "NONET_L01_P-001" (hatched Horizontal grid 4 track 5, remove dead copper, pour order 200): 10135,4835
no net on Bottom Layer "NONET_L01_P-001" (hatched Horizontal grid 4 track 5, remove dead copper, pour order 199): 10167.01,4837.99
VDC on Bottom Layer "NONET_L01_P-001" (hatched Horizontal grid 4 track 5, remove dead copper, pour order 188): 3100,5175 3120,5155 3685,5155 3685,5115 3650,5080 3280,5080 3075,4875 3075,5150 3040,5185 3070,5215 3125,5215
VDC on Bottom Layer "NONET_L01_P-001" (hatched Horizontal grid 4 track 5, remove dead copper, pour order 186): 2645,5170 2630,5155 2630,5100 2650,5080 2720,5080 2815,4985 2875,4985 2875,5155 2860,5170
NetD3_2 on Bottom Layer "NONET_L01_P-001" (hatched Horizontal grid 4 track 5, remove dead copper, pour order 179): 5159.36,1871.29 5189.38,1859.14 5227.18,1859.1 5270,1883.57 5270,2005 5000,2275 5000,2385 5070,2455 5235,2455 5250,2470 5250,2569.99 5229.99,2590 5105,2590 4897.86,2797.14 4897.86,2899.29 4880,2935 4770,2935 4725,2890 4725,2645 4620,2540 4620,2475 4655,2440 4755,2440 4850,2345 4850,2224.51 5124.34,1963.86
GND on Bottom Layer "NONET_L01_P-001" (hatched Horizontal grid 4 track 5, remove dead copper, pour order 173): 3867.5,1557.5 3918.57,1673.57 4135,1890 4135,3090 4180,3135 5090,3135 5145,3080 5145,2900 5120,2875 5055,2875 5040,2890 5040,2975 4965,3050 4405,3050 4340,2985 4340,1619.59 3915,1264.59 3915,1510
NetD27_2 on Bottom Layer "NONET_L01_P-001" (hatched Horizontal grid 4 track 5, remove dead copper, pour order 159): 525,1005 495,975 495,745 520,720 895,720 1160,985 1160,1160 1120,1200 965,1200 910,1145 770,1005
NetF3_1 on Bottom Layer "NONET_L01_P-001" (hatched Horizontal grid 4 track 5, remove dead copper, pour order 155): 405,3201 390,3186 390,3001 415,2976 585,2976 620,3011 670,3061 785,3061 805,3081 805,3176 780,3201
no net on Bottom Layer "NONET_L01_P-001" (hatched Horizontal grid 4 track 5, remove dead copper, pour order 153): 390,3036
GND+12V on Bottom Layer "NONET_L01_P-001" (hatched Horizontal grid 4 track 5, remove dead copper, pour order 83): 9965.27,4335 10505,4335 10520.98,4319.02 10520.98,4150 10485.98,4115 9980.98,4115
VDC on Bottom Layer "NONET_L01_P-001" (hatched Horizontal grid 4 track 5, remove dead copper, pour order 146): 4133.9,5526.1 4605,5055 5145,5055 5315,4885 5315,4457.69 5270,4430 5270,4074.08 5190.92,3995 4775,3995 4715,3935 4715,3535 4795,3455 4875,3455 4910,3420 4910,3280 4895,3265 4790,3265 4625,3430 4625,3776.03 4576.79,3814.34 4515.14,3814.87 4495,3835.01 4495,3945 4660,4110 5080,4110 5140,4170 5140,4425 5095,4470 5095,4710 5030,4775 4265,4775 3861.71,5178.29
NetD20_1 on Bottom Layer "NONET_L01_P-001" (hatched Horizontal grid 4 track 5, remove dead copper, pour order 144): 831,3949 866,3914 866,3504 996,3374 996,2699 986,2689 726,2689 691,2724 691,2889 716,2914 836,2914 891,2969 891,3219 826,3284 661,3284 641,3304 641,3914 676,3949
no net on Bottom Layer "NONET_L01_P-001" (hatched Horizontal grid 4 track 5, remove dead copper, pour order 130): 285,4790
GND+15V on Bottom Layer "NONET_L01_P-001" (hatched Horizontal grid 4 track 5, remove dead copper, pour order 115): 7655,3380 7728.08,3186.92 8345,2570 8845,2570 8890,2525 8890,2025 9220,1695 10035,1695 10060,1670 10060,1450 10130,1380 10325,1380 10380,1435 10380,1710 10400,1730 10510,1730 10510,2475 10400,2585 9885,2585 9865,2605 9865,2805 9815,2855 9580,2855 9570,2845 9570,2385 9580,2375 9545,2340 9280,2340 9145,2475 9145,2705 8985,2865 8565,2865 8415,3015 8415,3340 8365,3390 7705,3390
GND+15V on Bottom Layer "NONET_L01_P-001" (hatched Horizontal grid 4 track 5, remove dead copper, pour order 114): 10420,3595 10420,3460 10460,3420 10630,3420 10660,3450 10660,3560
GND+15V on Bottom Layer "NONET_L01_P-001" (hatched Horizontal grid 4 track 5, remove dead copper, pour order 113): 9645,3545 9645,3455 9625,3435 9530,3435 9530,3535 9520,3545 9525,3550 9605,3550
no net on Bottom Layer "NONET_L01_P-001" (hatched Horizontal grid 4 track 5, remove dead copper, pour order 112): 9665,3545
VCC+15V on Bottom Layer "NONET_L01_P-001" (hatched Horizontal grid 4 track 5, remove dead copper, pour order 111): 9940,2975 9980,2935 10180,2935 10190,2945 10190,3490 10160,3520 9695,3520 9685,3510 9685,3420 9875,3420 9940,3355
VCC-15V on Bottom Layer "NONET_L01_P-001" (hatched Horizontal grid 4 track 5, remove dead copper, pour order 110): 9620,3405 9600,3405 9555,3360 9555,3185 9585,3155 9800,3155 9805,3150 9875,3220 9875,3400 9865,3410 9855,3400 9615,3400
GND+15V on Bottom Layer "NONET_L01_P-001" (hatched Horizontal grid 4 track 5, remove dead copper, pour order 109): 7440,3555 7440,3400 7480,3360 8780,3360 8875,3265 8875,3035 8925,2985 9535,2985 9535,3535 10660,3535 10660,3785 10615,3830 8515,3830 8320,3635 7520,3635
GND+15V on Bottom Layer "GND+15V_L02_P078" (solid, pour order 78): 9130,980 9075,925 9075,685 9125,635 9890,635 9960,705 9960,845 9965,850 10740,850 10765,875 10765,995 10750,1010 10325,1010 10280,965 9575,965 9555,965 9535,965 9120,965
VCC+5V on Bottom Layer "VCC+5V_L02_P077" (solid, pour order 77): 9810,1355 9775,1320 9775,1005 9800,980 10245,980 10290,1025 10755,1025 10770,1040 10770,1175 10685,1260 9930,1260 9930,1330 9905,1355
VCC+15V on Bottom Layer "VCC+15V_L02_P076" (solid, pour order 76): 9165,1350 9120,1305 9120,1005 9715,1005 9735,1025 9735,1335 9720,1350 9195,1350
GND+12V on Bottom Layer "GND+12V_L02_P068" (solid, pour order 68): 8935.71,4832.99 8875.71,4772.99 8875.71,4112.99 10050.71,4112.99 10195,4257.28 10195,4810 10167.01,4837.99 8935.71,4837.99
"MON GND" on Bottom Layer "MON_GND_L02_P054" (solid, pour order 54): 9060,6240 9075,6225 9785,6225 9900,6110 9900,5805 10030,5675 10540,5675 10630,5585 10630,5380 10580,5330 10375,5330 10360,5345 10335,5330 10315,5120 10202.5,5112.5 10125,5120 9715,5120 8700,5120 8675,5145 8675,5650 8700,5675 9060,5675 9060,6185 9095,6220
VCC+18V on Bottom Layer "VCC+18V_L02_P025" (hatched Horizontal grid 4 track 4, remove dead copper, pour order 25): 6685,3090 6711.7,3063.3 6711.7,3011.7 6695,2995 6631.7,2995 6631.7,2883.3 6660,2855 7100,2855 7126.7,2828.3 7126.7,2765 7096.7,2735 6666.7,2735 6641.7,2710 6646.37,2372.23 6756.7,2332.11 6756.7,2255 6555,2255 6550,2260 6550,3090
NetR2_1 on Bottom Layer "NETR2_1_L02_P021" (solid, pour order 21): 6916.62,5740 6886.62,5710 6886.62,5590 6916.62,5560 7216.62,5560 7246.62,5590 7246.62,5725 7231.62,5740
NetR1_2 on Bottom Layer "NETR1_2_L02_P019" (solid, pour order 19): 6636.62,5245 6616.62,5225 6616.62,5085 6626.62,5075 6946.62,5075 6961.62,5090 6961.62,5235 6951.62,5245
VDC on Bottom Layer "VDC_L02_P000" (solid, remove dead copper, pour order 0): 2815,4205 2790,4180 2635,4180 2610,4155 2610,3580 2655,3535 3020,3535 3105,3620 3105,5080 4310,5080 4425,5195 4425,5430.71 4473,5465 5775,5465 5855,5545 6660,5545 6695,5580 6695,5735 6670,5760 4595,5760 4110,5760 4040,5830 4040,5955 4015,5980 3485,5980 3455,5950 3455,5465 3395,5405 2320,5405 2280,5365 2280,5105 2320,5065 2815,5065
no net on Bottom Layer "NONET_L02_P013" (solid, pour order 13): 3875,1700
GND on Bottom Layer "GND_L02_P002" (hatched Horizontal grid 4 track 4, remove dead copper, pour order 2): 2940,3230 3015,3155 3020,2535 2961.7,2484.23 2565,2485 2405,2325 2405,1775 2485,1695 4020,1695 4040,1675 4040,1225 3875,1060 2195,1060 1970,1285 1970,2615 2170,2815 2495,2815 2585,2905 2585,3180 2635,3230

## Other copper
Top Layer:
  text "Top Layer" at 235,6778.32 h100
Bottom Layer:
  text ".Layer_Name" at 225,6783.32 h100

## Silkscreen, mask and mechanical layers (free items; w line width, h text height)
Top Overlay:
  drawing of 589 lines, arcs and shapes, not listed
  text "SUPPLY PWR" at 10825,5125 h60 r90
  text "TEST PWR" at 10875,3955 h70 r90
  text "MAIN PWR" at 10862.71,2957.16 h70 r90
  text "220V AC" at 160,2955 h70 r90
  text "DSP PWR" at 10950,545 h70 r90
Bottom Overlay:
  text ".Layer_Name" at 260,6793.32 h100
Top Paste:
  text ".Layer_Name" at 285,6773.32 h100
Bottom Paste:
  text ".Layer_Name" at 275,6760 h100
Mechanical 1:
  lines w20: 0,0 11023.62,0 11023.62,6692.91 0,6692.91 0,0
  lines w30: 670,3240 819.97,3240 847.66,3212.31 847.66,3008.31 809.35,2970 680,2970 ; 960,1235 1145,1235 1220,1160 ; 1032.48,3015.42 1032.48,3120.42 ; 1290,1790 1290,1505 1360,1435 ; 1290,1895 1290,2180 ; 1290,2325 1290,2610 ; 1290,4095 1290,4320 ; 1290,4490 1290,4775 ; 1290,4920 1290,5205 ; 3905,835 4265,835 ; 4591.73,3545.8 4591.73,3640.8 ; 4744.12,3544.16 4744.12,3639.16 ; 4755,3840 4755,3920 4800,3965 4840,3965 ; 4902.56,3964.28 5017.56,3964.28 ; 5005,3380 5005,3250 5065,3190 ; 5084.3,1855.41 5084.3,1960.41 ; 5090,4160 5090,4320 ; 5100,3960 5155,3960 5175,3940 5175,3860 ; 5299.9,3395.35 5334.9,3430.35 5334.9,3485.35 ; 5315,1875 5315,1980 ; 5320,4160 5320,4320 ; 5350,3710 5350,3780 ; 5960,3050 5960,3125 ; 6160,3520 6205,3565 6205,3650 ; 6200.93,3740.06 6200.93,3850.06 ; 6213.25,2953.41 6213.25,3013.41 ; 6230,5095 6230,5081.13 6266.13,5045 6290,5045 ; 6392.05,3460 6392.05,3560
  text ".Layer_Name" at 245,6760 h100
Drill Drawing:
  text ".Layer_Name" at 255,6778.32 h100

## Text inside footprints (layer, text, board x,y; h text height)
C2: Top Overlay "+" at 6622.68,2703.31 h59.06
C44: Top Overlay "+" at 6622.68,2918.31 h59.06
D2: Top Overlay "P" at 8340.75,5190.63 h47.24; Top Overlay "N" at 7809.25,5239.84 h47.24 r180; Bottom Overlay "P" at 8365,5200 h47.24; Bottom Overlay "N" at 7815,5200 h47.24; Mechanical 9 "NUT+INSB" at 8163.94,5080.98 h47.24 r180
D5: Mechanical 9 "E" at 5695.55,4146.69 h31.25 r270; Mechanical 9 "C" at 5589.25,4310.08 h31.25 r270; Mechanical 9 "B" at 5695.55,4343.54 h31.25 r270
D7: Mechanical 9 "B" at 6999.8,1884.45 h31.25 r180; Mechanical 9 "C" at 6966.34,1990.75 h31.25 r180; Mechanical 9 "E" at 6802.95,1884.45 h31.25 r180
D8: Mechanical 9 "E" at 5762.32,2825.32 h31.25 r180; Mechanical 9 "C" at 5925.71,2931.61 h31.25 r180; Mechanical 9 "B" at 5959.17,2825.32 h31.25 r180
D9: Mechanical 9 "B" at 6240.44,3100.32 h31.25 r180; Mechanical 9 "C" at 6206.97,3206.62 h31.25 r180; Mechanical 9 "E" at 6043.59,3100.32 h31.25 r180
D14: Top Overlay "P" at 8480.75,2475.63 h47.24; Top Overlay "N" at 7949.25,2524.84 h47.24 r180; Bottom Overlay "P" at 8510,2495 h47.24; Bottom Overlay "N" at 8110,2500 h47.24; Mechanical 9 "NUT+INSB" at 8303.94,2365.98 h47.24 r180
D15: Mechanical 9 "C" at 7530.71,2296.61 h31.25 r180; Mechanical 9 "B" at 7564.17,2190.32 h31.25 r180; Mechanical 9 "E" at 7367.32,2190.32 h31.25 r180
J1: Top Overlay "2" at 550,5935 h47.24; Top Overlay "1" at 565,5425 h47.24; Bottom Overlay "2" at 635,5935 h47.24; Bottom Overlay "1" at 628.43,5425.13 h47.24
J2: Top Overlay "1" at 10685,820 h59.06; Top Overlay "2" at 10690,1195 h59.06; Bottom Overlay "2" at 10709.68,1222.64 h59.06 r90; Bottom Overlay "1" at 10709.68,858.46 h59.06 r90
J3: Top Overlay "2" at 600,1105 h47.24; Top Overlay "1" at 620,585 h47.24; Bottom Overlay "2" at 675,1105 h47.24; Bottom Overlay "1" at 675,585 h47.24
J4: Top Overlay "2" at 10500,5045 h47.24; Top Overlay "1" at 10510,5575 h47.24; Bottom Overlay "2" at 10475.47,5070.35 h47.24 r270; Bottom Overlay "1" at 10473.5,5583.74 h47.24 r270
J5: Top Overlay "6" at 10490,2595 h61.52; Top Overlay "1" at 10500,3820 h61.52; Bottom Overlay "6" at 10473.5,2610.51 h61.52 r270; Bottom Overlay "1" at 10473.5,3839.65 h47.24 r270
J6: Top Overlay "1" at 475,2905 h61.52; Top Overlay "3" at 435,3660 h61.52; Bottom Overlay "1" at 535,2905 h61.52; Bottom Overlay "3" at 540,3660 h61.52
J7: Top Overlay "1" at 10645,4090 h47.24; Top Overlay "3" at 10640,4585 h47.24; Bottom Overlay "1" at 10534.53,4069.57 h47.24 r270; Bottom Overlay "3" at 10593.58,4581.38 h47.24 r90
L5: Top Overlay "1" at 2265,2770 h47.24; Top Overlay "2" at 2785,2780 h47.24; Top Overlay "3" at 2770,3970 h47.24; Top Overlay "4" at 2255,3970 h47.24
Q1: Mechanical 9 "NUT+INSB" at 5284.4,4460.83 h47.24 r180
Q2: Top Overlay "B" at 6226.89,2015.32 h47.24; Top Overlay "E" at 6226.89,2103.9 h47.24; Top Overlay "C" at 6217.05,1916.89 h47.24; Bottom Overlay "B" at 6230,2060 h47.24 r180; Bottom Overlay "C" at 6225,1965 h47.24 r180; Bottom Overlay "E" at 6230,2150 h47.24 r180
Q3: Top Overlay "C" at 6217.05,2223.31 h47.24; Top Overlay "E" at 6217.05,2400.47 h47.24; Top Overlay "B" at 6217.05,2311.89 h47.24; Bottom Overlay "E" at 6220,2445 h47.24 r180; Bottom Overlay "C" at 6220,2270 h47.24 r180; Bottom Overlay "B" at 6220,2360 h47.24 r180
Q4: Mechanical 9 "NUT+INSB" at 5126.92,1728.15 h47.24
Q5: Mechanical 9 "C" at 7641.52,2545.32 h47.24 r180; Mechanical 9 "B" at 7680.89,2439.02 h47.24 r180; Mechanical 9 "E" at 7478.13,2440.99 h47.24 r180
Q6: Mechanical 9 "E" at 6906.32,1697.74 h47.24; Mechanical 9 "B" at 6703.56,1699.71 h47.24; Mechanical 9 "C" at 6742.93,1593.41 h47.24
Q7: Mechanical 9 "B" at 7194.17,1884.45 h31.25 r180; Mechanical 9 "C" at 7160.71,1990.75 h31.25 r180; Mechanical 9 "E" at 6997.32,1884.45 h31.25 r180
Q8: Mechanical 9 "C" at 7701.78,2297.22 h31.25 r180; Mechanical 9 "B" at 7735.25,2190.92 h31.25 r180; Mechanical 9 "E" at 7538.4,2190.92 h31.25 r180
Q9: Mechanical 9 "B" at 7926.67,1518.66 h31.25; Mechanical 9 "C" at 7960.13,1412.36 h31.25; Mechanical 9 "E" at 8123.52,1518.66 h31.25
Q10: Mechanical 9 "B" at 8159.8,1249.45 h31.25 r180; Mechanical 9 "C" at 8126.34,1355.75 h31.25 r180; Mechanical 9 "E" at 7962.95,1249.45 h31.25 r180
R5: Mechanical 9 "TOP/BOT PAD" at 5774.49,4102.4 h5.91
R7: Mechanical 9 "TOP/BOT PAD" at 5697.6,4534.49 h5.91 r90
R13: Mechanical 9 "TOP/BOT PAD" at 5807.6,3174.49 h5.91 r90
R16: Mechanical 9 "TOP/BOT PAD" at 5692.6,3174.49 h5.91 r90
R18: Mechanical 9 "TOP/BOT PAD" at 6842.4,2741.61 h5.91 r270
R21: Mechanical 9 "TOP/BOT PAD" at 6972.4,2741.61 h5.91 r270
R23: Mechanical 9 "TOP/BOT PAD" at 7092.4,2741.61 h5.91 r270
T1: Top Overlay "1" at 6480,4970 h47.24; Top Overlay "9" at 6485,3380 h47.24; Top Overlay "10" at 7745,3205 h47.24; Top Overlay "18" at 7750,4960 h47.24
T2: Top Overlay "10" at 5215,3270 h47.24; Top Overlay "5" at 5252.92,3831.29 h47.24; Top Overlay "4" at 5875,3895 h47.24; Top Overlay "2" at 5875,3420 h47.24
U2: Top Overlay "521" at 7508.43,1915 h47.24 r90